# Altium PCB LED6432Clock.PcbDoc (part 6 of 6)
Units mm, origin at the board's own origin, x right, y up, seen from the top; angles counter-clockwise.
Board outline 152.4 x 101.6 mm, 2 copper layers (Top Layer, Bottom Layer); 48 components, 0 nets, 638 pads, 127 vias.
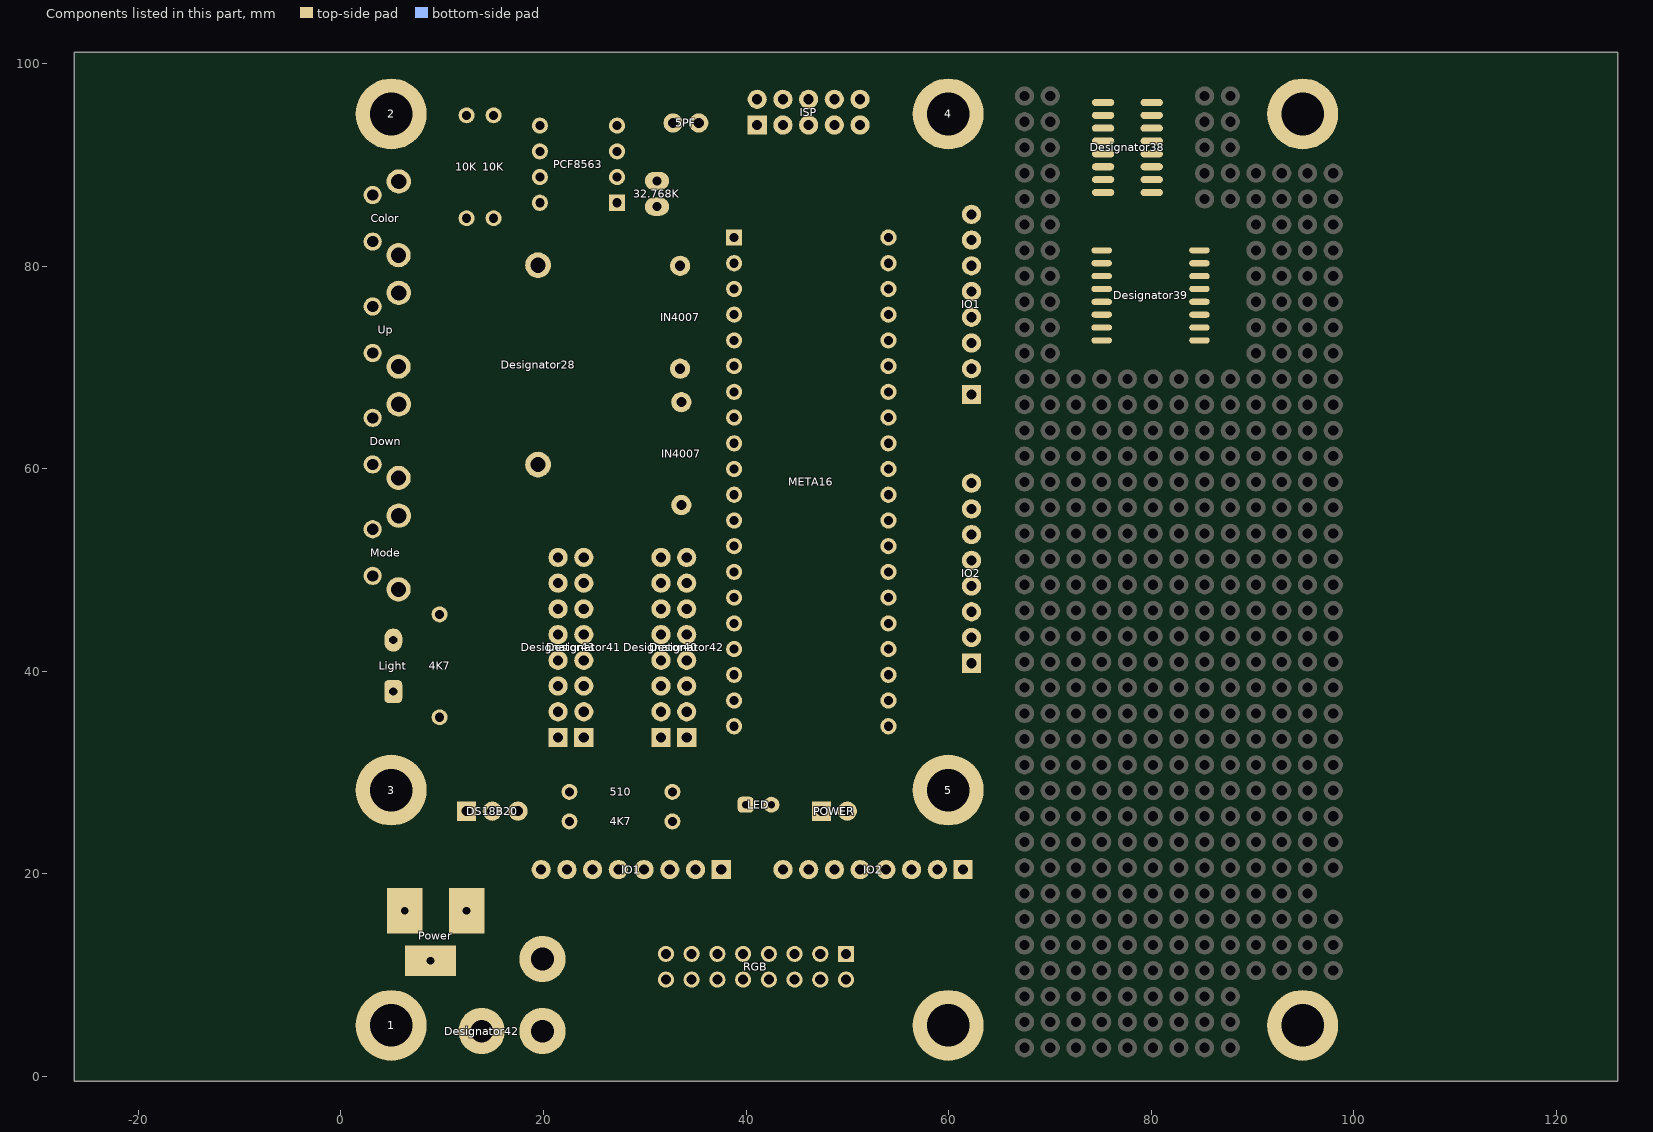
[diagram p6: the components of this part, seen from the top]

## Via types
v1: diameter 0.6, hole 0.3, Top Layer to Bottom Layer, 67 vias
v2: diameter 1.27, hole 0.711, Top Layer to Bottom Layer, 60 vias

## Nets (pads, with @x,y where several pads share a name; then routed paths per layer and width w, separated by ;. In a path a pad name is that pad's centre, name@x,y a point inside that pad or via, vN(x,y) a via of type N, cw(c..) or ccw(c..) an arc to the next point about the centre after c; other vN are vias at no path point) (continued)
copper on no net: (continued)
  Bottom Layer w0.16: 42.908,73.972 cw(c42.908,72.982) 43.609,73.682 ccw(c42.908,72.982) 42.908,73.972 ; 43.046,13.85 ccw(c43.409,14.213) 43.409,13.7 cw(c43.409,14.213) 43.046,13.85 ; 43.294,73.972 cw(c43.294,73.368) 43.722,73.795 ccw(c43.294,73.368) 43.294,73.972 ; 44.677,81.567 cw(c44.677,80.602) 45.359,81.284 ccw(c44.677,80.602) 44.677,81.567 ; 44.76,72.669 ccw(c44.76,73.66) 45.461,72.96 cw(c44.76,73.66) 44.76,72.669 ; 45.063,81.567 cw(c45.063,80.989) 45.472,81.398 ccw(c45.063,80.989) 45.063,81.567 ; 45.107,40.927 ccw(c45.107,42.325) 46.096,41.337 cw(c45.107,42.325) 45.107,40.927 ; 45.146,72.669 ccw(c45.146,73.274) 45.574,72.846 cw(c45.146,73.274) 45.146,72.669 ; 45.493,40.927 ccw(c45.493,41.939) 46.209,41.223 cw(c45.493,41.939) 45.493,40.927 ; v1@45.616,72.864 ccw(c45.616,73.278) 45.909,72.985 cw(c45.616,73.278) v1@45.616,72.864 ; v1@45.616,73.024 ccw(c45.616,73.824) 46.182,73.258 cw(c45.616,73.824) v1@45.616,73.024 ; v1@45.836,72.804 cw(c46.098,72.804) 45.913,72.989 ccw(c46.098,72.804) v1@45.836,72.804 ; 45.879,40.927 ccw(c45.879,41.553) 46.322,41.11 cw(c45.879,41.553) 45.879,40.927 ; v1@46.511,16.456 cw(c46.825,16.142) 46.825,16.586 ccw(c46.825,16.142) v1@46.511,16.456 ; v1@46.511,16.767 ccw(c46.947,17.204) 46.947,16.586 cw(c46.947,17.204) v1@46.511,16.767 ; 47.591,16.586 ccw(c47.591,17.204) 48.028,16.767 cw(c47.591,17.204) 47.591,16.586 ; 47.714,16.586 cw(c47.714,16.142) 48.028,16.456 ccw(c47.714,16.142) 47.714,16.586 ; 51.97,52.205 ccw(c51.97,54.437) 53.548,52.859 cw(c51.97,54.437) 51.97,52.205 ; 51.994,55.024 cw(c51.994,52.826) 53.548,54.38 ccw(c51.994,52.826) 51.994,55.024 ; 52.092,75.115 ccw(c52.092,77.175) 53.548,75.719 cw(c52.092,77.175) 52.092,75.115 ; 52.356,52.205 ccw(c52.356,54.051) 53.661,52.745 cw(c52.356,54.051) 52.356,52.205 ; 52.38,55.024 cw(c52.38,53.212) 53.661,54.493 ccw(c52.38,53.212) 52.38,55.024 ; 52.479,75.115 ccw(c52.479,76.788) 53.661,75.605 cw(c52.479,76.788) 52.479,75.115 ; 52.546,75.115 cw(c52.546,73.698) 53.548,74.7 ccw(c52.546,73.698) 52.546,75.115 ; 52.644,55.024 ccw(c52.644,56.303) 53.548,55.399 cw(c52.644,56.303) 52.644,55.024 ; 52.669,52.205 cw(c52.669,50.961) 53.548,51.84 ccw(c52.669,50.961) 52.669,52.205 ; 52.742,52.205 ccw(c52.742,53.665) 53.775,52.632 cw(c52.742,53.665) 52.742,52.205 ; 52.767,55.024 cw(c52.767,53.599) 53.775,54.607 ccw(c52.767,53.599) 52.767,55.024 ; 52.865,75.115 ccw(c52.865,76.402) 53.775,75.492 cw(c52.865,76.402) 52.865,75.115 ; 52.932,75.115 cw(c52.932,74.084) 53.661,74.813 ccw(c52.932,74.084) 52.932,75.115 ; 53.03,55.024 ccw(c53.03,55.916) 53.661,55.285 cw(c53.03,55.916) 53.03,55.024 ; 53.055,52.205 cw(c53.055,51.347) 53.661,51.953 ccw(c53.055,51.347) 53.055,52.205 ; 53.128,52.205 ccw(c53.128,53.278) 53.888,52.519 cw(c53.128,53.278) 53.128,52.205 ; 53.153,55.024 cw(c53.153,53.985) 53.888,54.72 ccw(c53.153,53.985) 53.153,55.024 ; 53.251,75.115 ccw(c53.251,76.016) 53.888,75.379 cw(c53.251,76.016) 53.251,75.115 ; 59.079,51.307 cw(c62.255,48.131) 62.255,52.622 ccw(c62.255,48.131) 59.079,51.307 ; 59.352,51.58 cw(c62.255,48.677) 62.255,52.782 ccw(c62.255,48.677) 59.352,51.58 ; 59.625,51.853 cw(c62.255,49.223) 62.255,52.942 ccw(c62.255,49.223) 59.625,51.853 ; 59.899,52.126 cw(c62.255,49.769) 62.255,53.102 ccw(c62.255,49.769) 59.899,52.126 ; 59.99,46.604 cw(c62.255,44.338) 62.255,47.542 ccw(c62.255,44.338) 59.99,46.604 ; 60.032,85.065 ccw(c60.032,87.338) 61.64,85.731 cw(c60.032,87.338) 60.032,85.065 ; 60.172,52.399 cw(c62.255,50.316) 62.255,53.262 ccw(c62.255,50.316) 60.172,52.399 ; 60.263,46.877 cw(c62.255,44.885) 62.255,47.702 ccw(c62.255,44.885) 60.263,46.877 ; 60.278,85.065 cw(c60.278,83.138) 61.64,84.5 ccw(c60.278,83.138) 60.278,85.065 ; 60.419,85.065 ccw(c60.419,86.952) 61.753,85.617 cw(c60.419,86.952) 60.419,85.065 ; 60.445,52.672 cw(c62.255,50.862) 62.255,53.422 ccw(c62.255,50.862) 60.445,52.672 ; 60.536,47.15 cw(c62.255,45.431) 62.255,47.862 ccw(c62.255,45.431) 60.536,47.15 ; 60.581,76.659 cw(c61.395,75.845) 61.927,76.866 ccw(c61.395,75.845) 60.581,76.659 ; 60.61,81.718 cw(c61.43,80.897) 61.942,81.938 ccw(c61.43,80.897) 60.61,81.718 ; 60.664,85.065 cw(c60.664,83.524) 61.753,84.613 ccw(c60.664,83.524) 60.664,85.065 ; 60.718,52.946 cw(c62.255,51.408) 62.255,53.582 ccw(c62.255,51.408) 60.718,52.946 ; 60.735,76.813 cw(c61.501,76.048) 62.001,77.008 ccw(c61.501,76.048) 60.735,76.813 ; 60.768,81.876 cw(c61.535,81.109) 62.013,82.082 ccw(c61.535,81.109) 60.768,81.876 ; 60.805,85.065 ccw(c60.805,86.566) 61.866,85.504 cw(c60.805,86.566) 60.805,85.065 ; 60.809,47.423 cw(c62.255,45.977) 62.255,48.022 ccw(c62.255,45.977) 60.809,47.423 ; 60.889,76.967 cw(c61.606,76.25) 62.075,77.15 ccw(c61.606,76.25) 60.889,76.967 ; 60.926,82.034 cw(c61.639,81.321) 62.083,82.225 ccw(c61.639,81.321) 60.926,82.034 ; 60.991,53.219 cw(c62.255,51.954) 62.255,53.742 ccw(c62.255,51.954) 60.991,53.219 ; 61.043,77.122 cw(c61.712,76.453) 62.149,77.291 ccw(c61.712,76.453) 61.043,77.122 ; 61.05,85.065 cw(c61.05,83.91) 61.866,84.726 ccw(c61.05,83.91) 61.05,85.065 ; 61.082,47.696 cw(c62.255,46.523) 62.255,48.182 ccw(c62.255,46.523) 61.082,47.696 ; 61.084,82.192 cw(c61.743,81.533) 62.154,82.369 ccw(c61.743,81.533) 61.084,82.192 ; 61.094,47.708 ccw(c60.389,48.412) 61.385,48.412 cw(c60.389,48.412) 61.094,47.708 ; 61.191,85.065 ccw(c61.191,86.18) 61.98,85.391 cw(c61.191,86.18) 61.191,85.065 ; 61.198,77.276 cw(c61.818,76.656) 62.223,77.433 ccw(c61.818,76.656) 61.198,77.276 ; 61.242,82.35 cw(c61.847,81.745) 62.225,82.513 ccw(c61.847,81.745) 61.242,82.35 ; 61.355,47.97 cw(c62.255,47.07) 62.255,48.342 ccw(c62.255,47.07) 61.355,47.97 ; 61.367,47.981 ccw(c60.935,48.412) 61.545,48.412 cw(c60.935,48.412) 61.367,47.981
  Bottom Layer w0.254: v1(49.927,57.429) v1@49.934,57.437
  Bottom Layer w0.4: v2(7.337,26.891) 8.041,26.187 ; v1@10.082,56.269 v1(10.183,56.167) 15.06,56.167 33.17,56.167 33.551,56.548 ; 12.401,84.734 10.107,87.029 10.107,96.197 11.707,97.798 37.514,97.798 38.834,96.477 41.095,96.477 ; 14.893,26.176 ccw(c16.177,26.47) 15.836,25.198 ; 14.941,26.187 14.991,26.187 16.762,24.417 21.807,24.417 22.561,25.171 ; 14.95,26.237 cw(c14.733,25.031) 15.916,25.348 ; 17.481,26.187 17.481,28.667 22.57,28.667 22.782,28.456 ; 19.64,86.258 19.64,84.429 24.034,80.035 33.483,80.035 ; v1(19.726,69.875) 33.483,69.875 ; 20.96,28.376 ccw(c21.465,29.233) 22.154,28.516 ; 21.414,28.108 ccw(c21.844,28.838) 22.432,28.227 ; 21.437,28.533 ccw(c21.799,29.16) 22.22,28.57 ; 21.621,28.426 cw(c21.221,27.733) 21.994,27.94 ; 22.561,28.092 25.634,28.092 28.555,25.171 32.721,25.171 37.928,25.171 37.935,25.179 46.445,25.179 ; 32.721,28.092 36.581,28.092 37.851,26.822 39.96,26.822 ; 33.61,56.413 33.61,58.563 35.017,59.969 38.817,59.969 47.488,59.969 v1@47.496,59.977 ; 33.907,48.75 35.583,48.75 ; 35.329,94.14 35.329,91.168 36.846,89.652 v1(50.003,89.652) 54.361,89.652 57.656,92.946 57.656,96.045 57.275,96.426 51.484,96.426 51.433,96.477 46.124,96.477 43.635,96.477 ; v1(36.599,45.448) 36.599,47.734 35.583,48.75 ; 38.817,57.429 v1(49.927,57.429) ; 45.518,96.116 ccw(c44.579,95.601) 44.856,96.635 ccw(c45.022,97.253) 45.553,96.896 ; 45.518,96.838 cw(c44.579,97.353) 44.856,96.319 cw(c45.022,95.701) 45.553,96.058 ; 45.557,25.452 cw(c46.397,24.042) 47.122,25.515 ; 45.696,25.848 cw(c46.209,25.124) 46.883,25.7 ; 45.975,25.278 ccw(c45.209,26.606) 46.716,26.325 ; 46.01,25.299 cw(c46.833,23.873) 47.259,25.463 ; 46.053,26.101 cw(c46.543,25.409) 47.187,25.96 ; 46.189,25.829 cw(c46.785,24.83) 47.299,25.873 ; 46.41,26.354 cw(c46.877,25.695) 47.491,26.22 ; 46.428,25.971 ccw(c46.094,26.531) 46.726,26.371 ; v1(47.445,58.605) 52.881,58.605 53.068,58.419 ; 47.453,26.187 46.445,25.179 ; 48.058,96.116 ccw(c47.119,95.601) 47.396,96.635 ccw(c47.562,97.253) 48.093,96.896 ; 48.058,96.838 cw(c47.119,97.353) 47.396,96.319 cw(c47.562,95.701) 48.093,96.058 ; v1@49.807,31.25 49.909,31.25 49.765,31.106 34.457,31.106 33.255,29.903 12.469,29.903 12.401,29.836 12.401,26.187 8.041,26.187 ; v1@49.934,59.901 50.003,59.969 54.057,59.969 ; 50.598,96.116 ccw(c49.659,95.601) 49.936,96.635 ccw(c50.102,97.253) 50.633,96.896 ; 50.598,96.838 cw(c49.659,97.353) 49.936,96.319 cw(c50.102,95.701) 50.633,96.058 ; 51.704,95.876 cw(c52.751,94.472) 53.003,96.205 ; 51.732,95.898 cw(c52.972,94.393) 53.159,96.334 ; 51.834,96.954 ccw(c53.124,98.016) 52.963,96.353 ; 51.856,96.925 ccw(c53.355,98.044) 53.086,96.193 ; 54.057,57.429 53.068,58.419 ; 56.056,92.037 cw(c61.319,90.981) 59.604,96.068 ; 56.148,91.639 cw(c60.468,90.482) 59.967,94.926 ; 56.192,92.716 cw(c61.063,91.739) 59.476,96.447 ; 56.3,92.206 cw(c60.398,91.108) 59.922,95.324 ; 56.328,93.395 cw(c60.808,92.496) 59.348,96.826 ; 56.4,93.106 cw(c57.324,92.583) v2@57.566,93.616 ; 56.452,92.773 cw(c60.327,91.735) 59.877,95.721 ; 56.465,94.074 cw(c60.553,93.254) 59.221,97.205 ; 56.519,92.918 cw(c57.627,92.389) v2@57.575,93.615 ; 56.553,91.135 ccw(c55.457,97.08) 60.956,94.568 ; 56.597,92.557 cw(c57.924,91.621) v2@57.648,93.222 ; 56.604,93.34 cw(c60.256,92.361) 59.832,96.118 ; 56.664,93.571 cw(c57.451,93.125) v2@57.657,94.006 ; 56.665,93.49 cw(c57.466,93.161) v2@57.652,94.007 ; 56.695,93.014 cw(c57.775,92.378) v2@57.579,93.616 ; 56.791,92.57 ccw(c56.248,93.325) v2@57.151,93.547 ; 56.806,93.518 cw(c57.595,93.141) v2@57.558,94.015 ; 56.807,92.41 cw(c60.088,91.531) 59.959,94.925 ; 56.874,92.539 cw(c58.13,91.884) v2@57.704,93.235 ; 56.884,92.698 cw(c58.351,92.305) v2@57.591,93.62 ; 56.919,95.122 ccw(c55.595,95.993) v2@57.148,96.313 ; 56.924,94.877 ccw(c55.88,95.769) v2@57.166,96.248 ; 56.936,94.302 cw(c56.652,93.436) 57.54,93.642 cw(c56.868,93.477) 57.272,92.916 ; 56.945,94.638 ccw(c58.419,94.937) v2@57.593,93.68 ; 56.947,92.934 cw(c60.066,92.098) 59.944,95.325 ; 57.011,93.132 cw(c57.582,93.658) 57.021,94.195 ; 57.053,91.547 ccw(c56.065,96.21) 60.625,94.821 ; 57.065,93.221 ccw(c56.677,93.495) v2@57.145,93.576 ; 57.076,93.248 cw(c57.626,93.023) v2@57.577,93.616 ; 57.113,92.999 ccw(c56.507,93.314) v2@57.159,93.52 ; v2@57.197,93.433 cw(c56.388,92.966) 57.29,92.724 ; v2@57.254,93.475 cw(c57.921,93.841) 57.396,94.391 ; 57.258,92.603 cw(c58.297,92.324) v2@57.782,93.268 ; v2@57.305,93.403 cw(c57.896,93.947) 57.316,94.503 ; 57.309,91.274 ccw(c56.31,96.691) 61.32,94.402 ; 57.335,95.753 cw(c57.765,95.469) v2@57.661,95.974 ; 57.365,95.394 ccw(c56.608,96.04) v2@57.541,96.388 ; v2@57.566,96.366 cw(c57.32,95.343) 58.296,95.738 ; v2@57.58,96.366 cw(c57.692,95.777) 58.226,96.051 ; v2@57.595,96.428 ccw(c58.098,97.075) 58.502,96.362 ; v2@57.6,93.674 cw(c58.211,94.236) 57.611,94.811 ; v2@57.605,93.667 cw(c58.393,94.1) 57.772,94.751 ; v2@57.668,94.075 ccw(c57.819,94.759) 58.196,94.168 ; v2@57.678,96.823 ccw(c58.063,98.379) 58.892,97.006 ; 57.716,91.688 ccw(c56.806,95.985) 61.008,94.705 ; v2@57.841,96.744 ccw(c58.498,97.588) 59.024,96.657 ; v2@57.894,93.945 cw(c58.525,94.526) 57.905,95.119 ; 57.902,94.293 ccw(c58.533,93.617) 57.609,93.649 cw(c58.732,93.651) 58.062,94.552 ; v2@57.955,93.86 cw(c58.865,94.359) 58.149,95.11 ; v2@57.992,93.531 cw(c59.608,93.069) 58.792,94.538 ; v2@57.996,96.296 cw(c58.479,96.177) 58.222,96.602 ; v2@57.999,93.556 cw(c59.365,93.254) 58.613,94.434 ; v2@58.009,93.635 cw(c59.898,93.569) 58.608,94.952 ; v2@58.009,93.651 cw(c59.721,93.652) 58.7,95.026 ; 58.064,91.414 ccw(c57.163,96.301) 61.684,94.236 ; 58.379,91.828 ccw(c57.546,95.759) 61.39,94.588 ; 58.469,91.862 cw(c59.13,90.942) v2@59.726,91.906 ; 58.476,91.669 cw(c59.384,90.111) v2@59.844,91.855 ; 58.485,91.972 cw(c59.054,90.975) v2@59.708,91.918 ; 58.53,92.161 cw(c58.994,91.538) v2@59.61,92.011 ; 58.568,91.911 cw(c59.138,90.617) v2@59.763,91.885 ; 58.82,91.553 ccw(c58.017,95.911) v2@62.047,94.07 ; 58.856,92.404 cw(c59.316,91.785) v2@59.928,92.254 ; 58.861,91.73 ccw(c58.353,92.916) v2@59.551,92.437 ; 58.956,92.212 cw(c59.472,91.494) v2@59.937,92.246 ; 59.037,92.286 cw(c59.455,91.553) v2@59.935,92.247 ; 59.12,91.76 cw(c59.578,91.073) v2@59.825,91.86 ; 59.13,91.767 ccw(c58.612,92.545) v2@59.529,92.361 ; 59.175,91.864 cw(c59.493,91.12) v2@59.794,91.872 ; 59.182,92.646 cw(c59.638,92.032) v2@60.245,92.498 ; 59.272,91.703 ccw(c58.927,92.742) v2@59.924,92.29 ; 59.311,92.155 cw(c59.733,91.431) v2@59.946,92.242 ; 59.348,92.732 ccw(c59.952,92.271) 59.476,91.679 ; 59.508,92.888 cw(c59.961,92.279) 60.562,92.741 ; 59.597,93.058 ccw(c60.209,92.591) v2@59.727,91.991 ; 59.846,93.384 ccw(c60.466,92.911) v2@59.977,92.303 ; v2@59.947,92.71 ccw(c59.922,93.992) 60.846,93.103 ; v2@59.96,92.31 ccw(c60.092,93.269) 60.698,92.514 ; v2@59.987,92.291 cw(c60.835,92.699) 60.11,93.299 ; v2@59.988,92.287 cw(c60.927,92.626) 60.154,93.257 ; v2@60.015,92.706 ccw(c60.266,94.537) 61.422,93.096 ; 60.095,93.71 ccw(c60.723,93.231) v2@60.228,92.615 ; v2@60.347,92.464 cw(c61.455,92.997) 60.508,93.78 ; v2@60.365,92.423 cw(c61.701,92.906) 60.6,93.804 ; v2@60.389,92.305 cw(c62.106,92.42) 60.81,93.552 ; v2@60.389,92.31 cw(c62.147,92.45) 60.805,93.594 ; v2@60.39,92.284 cw(c61.209,92.3) 60.619,92.867 ; 60.815,92.434 cw(c62.383,91.253) v2@62.345,93.215 ; 61.31,93.09 cw(c62.363,92.297) v2@62.338,93.615 ; 8.041,26.187 cw(c8.693,26.839) 7.772,26.875 ccw(c8.693,26.839) 8.041,26.187 ; 8.041,26.187 ccw(c7.389,25.536) 7.354,26.457 cw(c7.389,25.536) 8.041,26.187 ; 10.591,26.187 cw(c10.591,24.377) 11.871,25.657 ccw(c10.591,24.377) 10.591,26.187 ; 10.591,26.187 ccw(c10.591,27.998) 11.871,26.718 ; 10.591,26.187 ccw(c10.591,27.998) 11.871,26.718 ; 11.399,85.737 cw(c10.396,84.734) 11.814,84.734 ccw(c10.396,84.734) 11.399,85.737 ; 11.399,85.737 ccw(c12.401,86.74) 12.401,85.322 cw(c12.401,86.74) 11.399,85.737 ; 11.871,26.718 ccw(c10.591,27.998) 12.401,27.998 ; 11.871,26.718 ccw(c10.591,27.998) 12.401,27.998 ; 12.401,27.998 ccw(c14.212,27.998) 12.932,26.718 cw(c14.212,27.998) 12.401,27.998 ; 17.481,27.998 cw(c15.671,27.998) 16.951,26.718 ccw(c15.671,27.998) 17.481,27.998 ; 17.481,27.998 ccw(c19.292,27.998) 18.012,26.718 cw(c19.292,27.998) 17.481,27.998 ; 19.64,84.81 cw(c21.089,84.81) 20.065,85.834 ccw(c21.089,84.81) 19.64,84.81 ; 19.64,84.81 ccw(c18.192,84.81) 19.216,85.834 cw(c18.192,84.81) 19.64,84.81 ; 23.98,28.092 cw(c23.98,29.511) 22.977,28.508 ccw(c23.98,29.511) 23.98,28.092 ; 23.98,28.092 ccw(c23.98,26.674) 22.977,27.677 cw(c23.98,26.674) 23.98,28.092 ; 31.303,25.171 cw(c31.303,23.753) 32.306,24.756 ccw(c31.303,23.753) 31.303,25.171 ; 31.303,25.171 ccw(c31.303,26.59) 32.306,25.587 cw(c31.303,26.59) 31.303,25.171 ; 31.552,69.875 cw(c31.552,67.944) 32.918,69.31 ccw(c31.552,67.944) 31.552,69.875 ; 31.552,69.875 ccw(c31.552,71.807) 32.918,70.441 cw(c31.552,71.807) 31.552,69.875 ; 31.552,80.035 cw(c31.552,78.104) 32.918,79.47 ccw(c31.552,78.104) 31.552,80.035 ; 31.552,80.035 ccw(c31.552,81.967) 32.918,80.601 cw(c31.552,81.967) 31.552,80.035 ; 33.045,56.979 cw(c31.084,58.94) 31.084,56.167 ccw(c31.084,58.94) 33.045,56.979 ; 33.045,56.979 ccw(c31.679,58.345) 33.61,58.345 ; 33.045,56.979 ccw(c31.679,58.345) 33.61,58.345 ; 33.61,58.345 ccw(c35.542,58.345) 34.176,56.979 cw(c35.542,58.345) 33.61,58.345 ; 34.14,25.171 cw(c34.14,26.59) 33.137,25.587 ccw(c34.14,26.59) 34.14,25.171 ; 34.14,25.171 ccw(c34.14,23.753) 33.137,24.756 cw(c34.14,23.753) 34.14,25.171 ; 34.14,28.092 cw(c34.14,29.511) 33.137,28.508 ccw(c34.14,29.511) 34.14,28.092 ; 34.14,28.092 ccw(c34.14,26.674) 33.137,27.677 cw(c34.14,26.674) 34.14,28.092 ; 35.329,92.329 cw(c37.14,92.329) 35.86,93.61 ccw(c37.14,92.329) 35.329,92.329 ; 35.329,92.329 ccw(c33.519,92.329) 34.799,93.61 cw(c33.519,92.329) 35.329,92.329 ; 35.583,48.75 cw(c35.583,49.849) 34.723,49.166 ccw(c35.583,49.849) 35.583,48.75 ; 35.583,48.75 ccw(c35.583,47.791) 34.771,48.301 cw(c35.583,47.791) 35.583,48.75 ; 37.369,59.969 cw(c37.369,58.521) 38.393,59.545 ccw(c37.369,58.521) 37.369,59.969 ; 37.369,59.969 ccw(c37.369,61.418) 38.393,60.394 cw(c37.369,61.418) 37.369,59.969 ; 38.542,26.822 cw(c38.542,25.404) 39.545,26.407 ccw(c38.542,25.404) 38.542,26.822 ; 38.542,26.822 ccw(c38.542,28.241) 39.545,27.238 cw(c38.542,28.241) 38.542,26.822 ; 39.284,96.477 cw(c39.284,94.666) 40.565,95.946 ccw(c39.284,94.666) 39.284,96.477 ; 39.284,96.477 ccw(c39.284,98.287) 40.565,97.007 cw(c39.284,98.287) 39.284,96.477 ; 40.266,57.429 cw(c40.266,58.878) 39.242,57.854 ccw(c40.266,58.878) 40.266,57.429 ; 40.266,57.429 ccw(c40.266,55.981) 39.242,57.005 cw(c40.266,55.981) 40.266,57.429 ; 40.266,59.969 cw(c40.266,61.418) 39.242,60.394 ccw(c40.266,61.418) 40.266,59.969 ; 40.266,59.969 ccw(c40.266,58.521) 39.242,59.545 cw(c40.266,58.521) 40.266,59.969 ; 44.257,96.058 cw(c44.788,95.701) 44.954,96.319 ; 44.257,96.058 cw(c44.788,95.701) 44.954,96.319 ; 44.257,96.058 cw(c44.788,95.701) 44.954,96.319 ; 44.257,96.896 ccw(c44.788,97.253) 44.954,96.635 ; 44.257,96.896 ccw(c44.788,97.253) 44.954,96.635 ; 44.257,96.896 ccw(c44.788,97.253) 44.954,96.635 ; 44.292,96.116 cw(c45.231,95.601) 44.954,96.635 ; 44.292,96.116 cw(c45.231,95.601) 44.954,96.635 ; 44.292,96.116 cw(c45.231,95.601) 44.954,96.635 ; 44.292,96.838 ccw(c45.231,97.353) 44.954,96.319 ; 44.292,96.838 ccw(c45.231,97.353) 44.954,96.319 ; 44.292,96.838 ccw(c45.231,97.353) 44.954,96.319 ; 44.364,96.477 cw(c44.364,94.666) 45.645,95.946 ccw(c44.364,94.666) 44.364,96.477 ; 44.364,96.477 ccw(c44.364,98.287) 45.645,97.007 cw(c44.364,98.287) 44.364,96.477 ; 45.446,96.477 cw(c45.446,98.287) 44.165,97.007 ccw(c45.446,98.287) 45.446,96.477 ; 45.446,96.477 ccw(c45.446,94.666) 44.165,95.946 cw(c45.446,94.666) 45.446,96.477 ; 46.445,25.179 cw(c47.139,24.486) 47.317,25.45 ccw(c47.139,24.486) 46.445,25.179 ; 46.445,25.179 ccw(c45.752,25.873) 46.716,26.051 cw(c45.752,25.873) 46.445,25.179 ; 46.797,96.058 cw(c47.328,95.701) 47.494,96.319 ; 46.797,96.058 cw(c47.328,95.701) 47.494,96.319 ; 46.797,96.058 cw(c47.328,95.701) 47.494,96.319 ; 46.797,96.896 ccw(c47.328,97.253) 47.494,96.635 ; 46.797,96.896 ccw(c47.328,97.253) 47.494,96.635 ; 46.797,96.896 ccw(c47.328,97.253) 47.494,96.635 ; 46.832,96.116 cw(c47.771,95.601) 47.494,96.635 ; 46.832,96.116 cw(c47.771,95.601) 47.494,96.635 ; 46.832,96.116 cw(c47.771,95.601) 47.494,96.635 ; 46.832,96.838 ccw(c47.771,97.353) 47.494,96.319 ; 46.832,96.838 ccw(c47.771,97.353) 47.494,96.319 ; 46.832,96.838 ccw(c47.771,97.353) 47.494,96.319 ; 46.904,96.477 cw(c46.904,94.666) 48.185,95.946 ccw(c46.904,94.666) 46.904,96.477 ; 46.904,96.477 ccw(c46.904,98.287) 48.185,97.007 cw(c46.904,98.287) 46.904,96.477 ; 47.986,96.477 cw(c47.986,98.287) 46.705,97.007 ccw(c47.986,98.287) 47.986,96.477 ; 47.986,96.477 ccw(c47.986,94.666) 46.705,95.946 cw(c47.986,94.666) 47.986,96.477 ; 49.337,96.058 cw(c49.868,95.701) 50.034,96.319 ; 49.337,96.058 cw(c49.868,95.701) 50.034,96.319 ; 49.337,96.058 cw(c49.868,95.701) 50.034,96.319 ; 49.337,96.896 ccw(c49.868,97.253) 50.034,96.635 ; 49.337,96.896 ccw(c49.868,97.253) 50.034,96.635 ; 49.337,96.896 ccw(c49.868,97.253) 50.034,96.635 ; 49.372,96.116 cw(c50.311,95.601) 50.034,96.635 ; 49.372,96.116 cw(c50.311,95.601) 50.034,96.635 ; 49.372,96.116 cw(c50.311,95.601) 50.034,96.635 ; 49.372,96.838 ccw(c50.311,97.353) 50.034,96.319 ; 49.372,96.838 ccw(c50.311,97.353) 50.034,96.319 ; 49.372,96.838 ccw(c50.311,97.353) 50.034,96.319 ; 49.444,96.477 cw(c49.444,94.666) 50.725,95.946 ccw(c49.444,94.666) 49.444,96.477 ; 49.444,96.477 ccw(c49.444,98.287) 50.725,97.007 cw(c49.444,98.287) 49.444,96.477 ; 50.526,96.477 cw(c50.526,98.287) 49.245,97.007 ccw(c50.526,98.287) 50.526,96.477 ; 50.526,96.477 ccw(c50.526,94.666) 49.245,95.946 cw(c50.526,94.666) 50.526,96.477 ; 52.609,59.969 cw(c52.609,58.521) 53.633,59.545 ccw(c52.609,58.521) 52.609,59.969 ; 52.609,59.969 ccw(c52.609,61.418) 53.633,60.394 cw(c52.609,61.418) 52.609,59.969 ; 53.068,58.419 cw(c52.125,57.477) 53.458,57.444 ccw(c52.125,57.477) 53.068,58.419 ; 53.068,58.419 ccw(c54.01,59.361) 54.043,58.029 cw(c54.01,59.361) 53.068,58.419 ; 56.082,94.615 ccw(c57.246,95.551) v2@57.5,94.079 ; 56.082,94.615 ccw(c57.246,95.551) v2@57.5,94.079 ; 56.082,94.615 ccw(c57.246,95.551) v2@57.5,94.079 ; 56.484,94.62 ccw(c57.687,95.697) v2@57.598,94.085 ; 56.484,94.62 ccw(c57.687,95.697) v2@57.598,94.085 ; 56.484,94.62 ccw(c57.687,95.697) v2@57.598,94.085 ; 56.507,94.086 ccw(c57.378,94.786) v2@57.568,93.685 ; 56.507,94.086 ccw(c57.378,94.786) v2@57.568,93.685 ; 56.507,94.086 ccw(c57.378,94.786) v2@57.568,93.685 ; 56.557,96.261 ccw(c56.675,96.794) v2@57.175,96.575 ; 56.557,96.261 ccw(c56.675,96.794) v2@57.175,96.575 ; 56.557,96.261 ccw(c56.675,96.794) v2@57.175,96.575 ; 56.637,92.218 cw(c58.419,91.414) v2@57.728,93.244 ; 56.637,92.218 cw(c58.419,91.414) v2@57.728,93.244 ; 56.637,92.218 cw(c58.419,91.414) v2@57.728,93.244 ; 56.683,95.004 cw(c55.309,93.79) v2@57.14,93.677 ; 56.683,95.004 cw(c55.309,93.79) v2@57.14,93.677 ; 56.683,95.004 cw(c55.309,93.79) v2@57.14,93.677 ; 56.748,93.185 cw(c57.937,92.864) v2@57.421,93.982 ; 56.748,93.185 cw(c57.937,92.864) v2@57.421,93.982 ; 56.748,93.185 cw(c57.937,92.864) v2@57.421,93.982 ; 56.932,93.557 ccw(c57.51,94.021) v2@57.636,93.291 ; 56.932,93.557 ccw(c57.51,94.021) v2@57.636,93.291 ; 56.932,93.557 ccw(c57.51,94.021) v2@57.636,93.291 ; 57.001,94.315 ccw(c58.239,94.221) v2@57.297,93.413 ; 57.001,94.315 ccw(c58.239,94.221) v2@57.297,93.413 ; 57.001,94.315 ccw(c58.239,94.221) v2@57.297,93.413 ; 57.017,94.025 cw(c56.655,93.701) v2@57.139,93.674 ; 57.017,94.025 cw(c56.655,93.701) v2@57.139,93.674 ; 57.017,94.025 cw(c56.655,93.701) v2@57.139,93.674 ; 57.033,92.576 ccw(c55.935,93.203) v2@57.154,93.536 ; 57.033,92.576 ccw(c55.935,93.203) v2@57.154,93.536 ; 57.033,92.576 ccw(c55.935,93.203) v2@57.154,93.536 ; 57.034,93.099 cw(c57.936,92.691) v2@57.586,93.618 ; 57.034,93.099 cw(c57.936,92.691) v2@57.586,93.618 ; 57.034,93.099 cw(c57.936,92.691) v2@57.586,93.618 ; 57.146,92.406 ccw(c56.621,93.253) v2@57.542,93.637 ; 57.146,92.406 ccw(c56.621,93.253) v2@57.542,93.637 ; 57.146,92.406 ccw(c56.621,93.253) v2@57.542,93.637 ; 57.154,95.093 cw(c56.417,94.456) v2@57.217,93.899 ; 57.154,95.093 cw(c56.417,94.456) v2@57.217,93.899 ; 57.154,95.093 cw(c56.417,94.456) v2@57.217,93.899 ; 57.182,92.838 cw(c57.909,92.424) v2@57.688,93.231 ; 57.182,92.838 cw(c57.909,92.424) v2@57.688,93.231 ; 57.182,92.838 cw(c57.909,92.424) v2@57.688,93.231 ; v2@57.22,96.49 ccw(c58.009,96.29) 57.511,95.646 ; v2@57.22,96.49 ccw(c58.009,96.29) 57.511,95.646 ; v2@57.22,96.49 ccw(c58.009,96.29) 57.511,95.646 ; v2@57.243,93.368 cw(c56.77,92.962) 57.286,92.614 ; v2@57.243,93.368 cw(c56.77,92.962) 57.286,92.614 ; v2@57.243,93.368 cw(c56.77,92.962) 57.286,92.614 ; v2@57.266,96.093 ccw(c56.462,95.288) 56.462,96.426 cw(c56.462,95.288) v2@57.266,96.093 ; v2@57.266,96.093 cw(c56.326,95.152) 57.656,95.152 ccw(c56.326,95.152) v2@57.266,96.093 ; v2@57.318,94.002 ccw(c56.569,95.03) 57.825,94.833 ; v2@57.318,94.002 ccw(c56.569,95.03) 57.825,94.833 ; v2@57.318,94.002 ccw(c56.569,95.03) 57.825,94.833 ; 57.323,94.281 cw(c56.673,93.706) v2@57.539,93.653 ; 57.323,94.281 cw(c56.673,93.706) v2@57.539,93.653 ; 57.323,94.281 cw(c56.673,93.706) v2@57.539,93.653 ; 57.491,94.704 cw(c56.853,94.152) v2@57.545,93.67 ; 57.491,94.704 cw(c56.853,94.152) v2@57.545,93.67 ; 57.491,94.704 cw(c56.853,94.152) v2@57.545,93.67 ; 57.546,92.653 ccw(c57.06,93.436) v2@57.911,93.791 ; 57.546,92.653 ccw(c57.06,93.436) v2@57.911,93.791 ; 57.546,92.653 ccw(c57.06,93.436) v2@57.911,93.791 ; v2@57.555,93.68 ccw(c56.769,94.868) 58.165,94.583 ; v2@57.555,93.68 ccw(c56.769,94.868) 58.165,94.583 ; v2@57.555,93.68 ccw(c56.769,94.868) 58.165,94.583 ; v2@57.608,96.392 ccw(c58.654,96.127) 57.994,95.273 ; v2@57.608,96.392 ccw(c58.654,96.127) 57.994,95.273 ; v2@57.608,96.392 ccw(c58.654,96.127) 57.994,95.273 ; v2@57.609,96.405 ccw(c58.791,96.551) 58.058,95.612 ; v2@57.609,96.405 ccw(c58.791,96.551) 58.058,95.612 ; v2@57.609,96.405 ccw(c58.791,96.551) 58.058,95.612 ; 57.656,92.941 cw(c58.109,92.941) 57.836,93.303 ccw(c58.109,92.941) 57.656,92.941 ; 57.656,92.941 ccw(c57.346,92.941) 57.441,93.236 cw(c57.346,92.941) 57.656,92.941 ; v2@57.666,95.975 cw(c57.811,95.301) 58.185,95.881 ; v2@57.666,95.975 cw(c57.811,95.301) 58.185,95.881 ; v2@57.666,95.975 cw(c57.811,95.301) 58.185,95.881 ; 57.777,94.523 ccw(c58.595,94.394) v2@57.925,93.907 ; 57.777,94.523 ccw(c58.595,94.394) v2@57.925,93.907 ; 57.777,94.523 ccw(c58.595,94.394) v2@57.925,93.907 ; 57.828,94.314 cw(c57.289,93.849) v2@57.873,93.442 ; 57.828,94.314 cw(c57.289,93.849) v2@57.873,93.442 ; 57.828,94.314 cw(c57.289,93.849) v2@57.873,93.442 ; v2@57.996,96.294 ccw(c59.3,95.964) 58.477,94.9 ; v2@57.996,96.294 ccw(c59.3,95.964) 58.477,94.9 ; v2@57.996,96.294 ccw(c59.3,95.964) 58.477,94.9 ; v2@57.999,96.492 ccw(c59.378,96.79) 58.614,95.605 ; v2@57.999,96.492 ccw(c59.378,96.79) 58.614,95.605 ; v2@57.999,96.492 ccw(c59.378,96.79) 58.614,95.605 ; v2@58.006,96.454 ccw(c60.146,96.719) 58.82,95.018 ; v2@58.006,96.454 ccw(c60.146,96.719) 58.82,95.018 ; v2@58.006,96.454 ccw(c60.146,96.719) 58.82,95.018 ; 58.164,93.925 cw(c57.725,93.545) 58.202,93.213 ; 58.164,93.925 cw(c57.725,93.545) 58.202,93.213 ; 58.164,93.925 cw(c57.725,93.545) 58.202,93.213 ; 58.599,92.033 ccw(c58.478,93.532) v2@59.624,92.557 ; 58.599,92.033 ccw(c58.478,93.532) v2@59.624,92.557 ; 58.599,92.033 ccw(c58.478,93.532) v2@59.624,92.557 ; 58.621,91.656 ccw(c58.499,93.557) v2@59.929,92.299 ; 58.621,91.656 ccw(c58.499,93.557) v2@59.929,92.299 ; 58.621,91.656 ccw(c58.499,93.557) v2@59.929,92.299 ; 59.24,92.084 cw(c59.287,91.49) v2@59.673,91.944 ; 59.24,92.084 cw(c59.287,91.49) v2@59.673,91.944 ; 59.24,92.084 cw(c59.287,91.49) v2@59.673,91.944 ; 59.584,91.718 ccw(c59.525,92.655) v2@60.229,92.034 ; 59.584,91.718 ccw(c59.525,92.655) v2@60.229,92.034 ; 59.584,91.718 ccw(c59.525,92.655) v2@60.229,92.034 ; 14.941,25.437 cw(c14.941,23.506) 16.307,24.872 ccw(c14.941,23.506) 14.941,25.437 ; 15.691,26.187 ccw(c17.381,26.187) 16.186,24.992 cw(c17.381,26.187) 15.691,26.187 ; 19.756,28.667 cw(c19.756,25.287) 22.146,27.677 ccw(c19.756,25.287) 19.756,28.667 ; 20.721,28.667 cw(c20.721,26.252) 22.429,27.96 ccw(c20.721,26.252) 20.721,28.667 ; 21.687,28.667 cw(c21.687,27.218) 22.712,28.243 ccw(c21.687,27.218) 21.687,28.667 ; 32.05,56.167 ccw(c32.05,57.974) 33.328,56.696 cw(c32.05,57.974) 32.05,56.167 ; 32.274,56.167 cw(c32.274,55.077) 33.045,55.848 ccw(c32.274,55.077) 32.274,56.167 ; 34.184,30.833 ccw(c33.869,31.148) 34.315,31.148 cw(c33.869,31.148) 34.184,30.833 ; v1@34.486,31.219 ccw(c34.759,31.492) 34.759,31.106 cw(c34.759,31.492) v1@34.486,31.219 ; 43.208,25.179 ccw(c43.208,30.433) 46.923,26.718 cw(c43.208,30.433) 43.208,25.179 ; 44.174,25.179 ccw(c44.174,29.467) 47.206,26.435 cw(c44.174,29.467) 44.174,25.179 ; 45.14,25.179 ccw(c45.14,28.501) 47.489,26.152 cw(c45.14,28.501) 45.14,25.179 ; 46.105,25.179 ccw(c46.105,27.535) 47.772,25.869 cw(c46.105,27.535) 46.105,25.179 ; 47.15,59.969 cw(c47.15,59.58) 47.425,59.855 ccw(c47.15,59.58) 47.15,59.969 ; 51.484,96.426 cw(c51.484,89.742) 57.155,93.279 ccw(c51.484,89.742) 51.484,96.426 ; 51.502,96.724 ccw(c52.223,97.444) 52.223,96.426 cw(c52.223,97.444) 51.502,96.724 ; 51.785,95.946 cw(c52.943,94.789) 52.943,96.426 ccw(c52.943,94.789) 51.785,95.946 ; 51.785,97.007 ccw(c53.188,98.41) 53.188,96.426 cw(c53.188,98.41) 51.785,97.007 ; 52.205,96.426 cw(c52.205,90.192) 57.495,93.491 ccw(c52.205,90.192) 52.205,96.426 ; 52.926,96.426 cw(c52.926,90.641) 57.834,93.702 ccw(c52.926,90.641) 52.926,96.426 ; 53.647,96.426 cw(c53.647,91.091) 58.174,93.914 ccw(c53.647,91.091) 53.647,96.426 ; 54.362,89.652 cw(c59.403,84.611) 59.78,91.73 ccw(c59.403,84.611) 54.362,89.652 ; 54.368,96.426 cw(c54.368,91.54) 58.513,94.126 ccw(c54.368,91.54) 54.368,96.426 ; 54.478,89.768 ccw(c49.221,95.025) 56.655,95.025 cw(c49.221,95.025) 54.478,89.768 ; 54.996,90.287 cw(c59.467,85.817) 59.802,92.129 ccw(c59.467,85.817) 54.996,90.287 ; 55.088,96.426 cw(c55.088,91.99) 58.852,94.337 ccw(c55.088,91.99) 55.088,96.426 ; 55.161,90.451 ccw(c50.586,95.025) 57.055,95.025 cw(c50.586,95.025) 55.161,90.451 ; 55.37,96.426 ccw(c55.37,99.611) 57.622,97.359 cw(c55.37,99.611) 55.37,96.426 ; 55.631,90.921 cw(c59.53,87.022) 59.823,92.529 ccw(c59.53,87.022) 55.631,90.921 ; 55.809,96.426 cw(c55.809,92.44) 59.192,94.549 ccw(c55.809,92.44) 55.809,96.426 ; 55.843,91.134 ccw(c51.952,95.025) 57.455,95.025 cw(c51.952,95.025) 55.843,91.134 ; 56.266,91.556 cw(c59.594,88.227) 59.844,92.928 ccw(c59.594,88.227) 56.266,91.556 ; 56.275,91.566 ccw(c54.191,93.65) 57.139,93.65 cw(c54.191,93.65) 56.275,91.566 ; 56.336,96.426 ccw(c56.336,98.645) 57.905,97.076 cw(c56.336,98.645) 56.336,96.426 ; 56.526,91.817 ccw(c53.318,95.025) 57.855,95.025 cw(c53.318,95.025) 56.526,91.817 ; 56.53,96.426 cw(c56.53,92.889) 59.531,94.761 ccw(c56.53,92.889) 56.53,96.426 ; 56.585,96.426 ccw(c56.585,97.389) 57.266,96.708 cw(c56.585,97.389) 56.585,96.426 ; 56.9,92.191 cw(c59.658,89.433) 59.865,93.328 ccw(c59.658,89.433) 56.9,92.191 ; 56.958,92.249 ccw(c55.556,93.65) 57.539,93.65 cw(c55.556,93.65) 56.958,92.249 ; 57.209,92.5 ccw(c54.683,95.025) 58.255,95.025 cw(c54.683,95.025) 57.209,92.5 ; v2@57.266,93.958 ccw(c56.326,94.898) 57.656,94.898 cw(c56.326,94.898) v2@57.266,93.958 ; 57.641,92.931 ccw(c56.922,93.65) 57.939,93.65 cw(c56.922,93.65) 57.641,92.931 ; 57.656,94.503 ccw(c58.426,94.503) 57.881,93.958 cw(c58.426,94.503) 57.656,94.503 ; 57.656,95.548 cw(c58.426,95.548) 57.881,96.093 ccw(c58.426,95.548) 57.656,95.548
  other v1: 50.061,31.097
  other v2: 103.841,-59.621 101.46,-58.246 106.223,-58.246 100.666,-57.335 98.285,-55.96 103.048,-55.96 101.46,-55.496 106.223,-55.496 103.841,-54.121 98.285,-53.21 103.048,-53.21 100.666,-51.835 4.955,2.275 59.955,2.275 94.955,2.275 2.574,3.65 7.337,3.65 57.574,3.65 62.337,3.65 92.574,3.65 97.337,3.65 2.574,6.4 7.337,6.4 57.574,6.4 62.337,6.4 92.574,6.4 97.337,6.4 4.955,7.775 59.955,7.775 94.955,7.775 4.955,25.516 59.955,25.516 2.574,26.891 57.574,26.891 62.337,26.891 2.574,29.641 7.337,29.641 57.574,29.641 62.337,29.641 4.955,31.016 59.955,31.016 59.955,92.275 94.955,92.275 5.162,92.652 57.574,93.65 62.337,93.65 92.574,93.65 97.337,93.65 2.781,94.027 7.544,94.027 57.574,96.4 62.337,96.4 92.574,96.4 97.337,96.4 2.781,96.777 7.544,96.777 59.955,97.775 94.955,97.775 5.162,98.152

## Keep-outs
Keep-Out Layer:
  lines w0.254: 30.275,32.215 25.245,32.215 25.271,32.24 25.271,52.433 30.224,52.433 30.351,52.306 30.351,32.139 ; -0.045,0.025 -0.045,100.025 99.955,100.025 99.955,0.025 -0.045,0.025

## Other copper
Top Layer:
  rectangle: 12.393,13.597 15.187,18.575
  rectangle: 13.003,9.279 22.147,14.054
  rectangle: 0.938,0.541 16.127,6.688
  rectangle: 0.963,3.233 5.205,14.968
  rectangle: 0.963,14.105 4.748,18.499
  region: 11.301,15.756 11.961,16.416 14.552,16.416 14.552,16.238 16.838,13.952 16.838,13.216 13.841,13.216 12.952,12.327
  region: 10.92,14.435 10.92,14.079 14.45,10.549 15.238,11.336 15.238,13.165 13.079,13.165 11.529,14.714
  text "LED6432" at 30.816,2.311 h3
Bottom Layer:
  rectangle: 13.028,9.355 22.197,13.825
  rectangle: 10.691,14.435 15.187,18.702
  rectangle: 4.824,0.541 16.101,6.51
  rectangle: 1.014,0.49 5.256,18.575
  region: 10.691,14.435 13.79,11.336 16.508,11.336 16.508,14.155 13.46,17.203 13.333,17.203

## Silkscreen, mask and mechanical layers (free items; w line width, h text height)
Top Overlay:
  lines w0.254: -0.045,23.266 64.955,23.266 ; 15.322,23.266 15.322,15.646 15.957,15.011 26.498,15.011 28.149,13.36 28.149,0.152 ; 64.955,0.025 64.955,100.025
  text "A" at 56.255,84.734 h1
  text "B" at 56.255,82.194 h1
  text "C" at 56.255,79.654 h1
  text "EN" at 56.255,77.114 h1
  text "D" at 56.255,74.574 h1
  text "G1" at 56.255,72.034 h1
  text "G2" at 56.255,69.494 h1
  text "B1" at 56.255,66.954 h1
  text "B2" at 56.255,58.191 h1
  text "LAT" at 55.755,55.651 h1
  text "CLK" at 55.755,53.111 h1
  text "R1" at 56.255,50.571 h1
  text "R2" at 56.255,48.031 h1
  text "GND" at 55.755,45.491 h1
  text "GND" at 55.755,42.951 h1
  text "GND" at 55.755,40.411 h1
  text "GND" at 54.735,24.341 h1.52 r90
  text "GND" at 9.345,24.138 h1.52 r90
  text "LED6432" at 30.816,2.311 h3
  text "+5V" at 21.816,1.354 h1.52
  text "GND" at 8.151,1.303 h1.52
Bottom Overlay:
  lines w0.254: -0.045,23.266 64.955,23.266 ; 15.322,23.266 15.322,15.519 15.83,15.011 26.371,15.011 28.149,13.233 28.149,0.152 ; 64.955,0.025 64.955,100.025
  text "LED6432 Clock" at 53.983,4.801 h1.52
  text "2016/3/23" at 54.084,1.905 h1.52

## Text inside footprints (layer, text, board x,y; h text height)
5PF: Top Overlay "+" at 31.265,94.648 h1.22 r180
Designator28: Top Overlay "+" at 18.185,57.239 h2.54 r270